# EAGLE board WS2812B-Breakout-v1-panel (EAGLE 5.12)
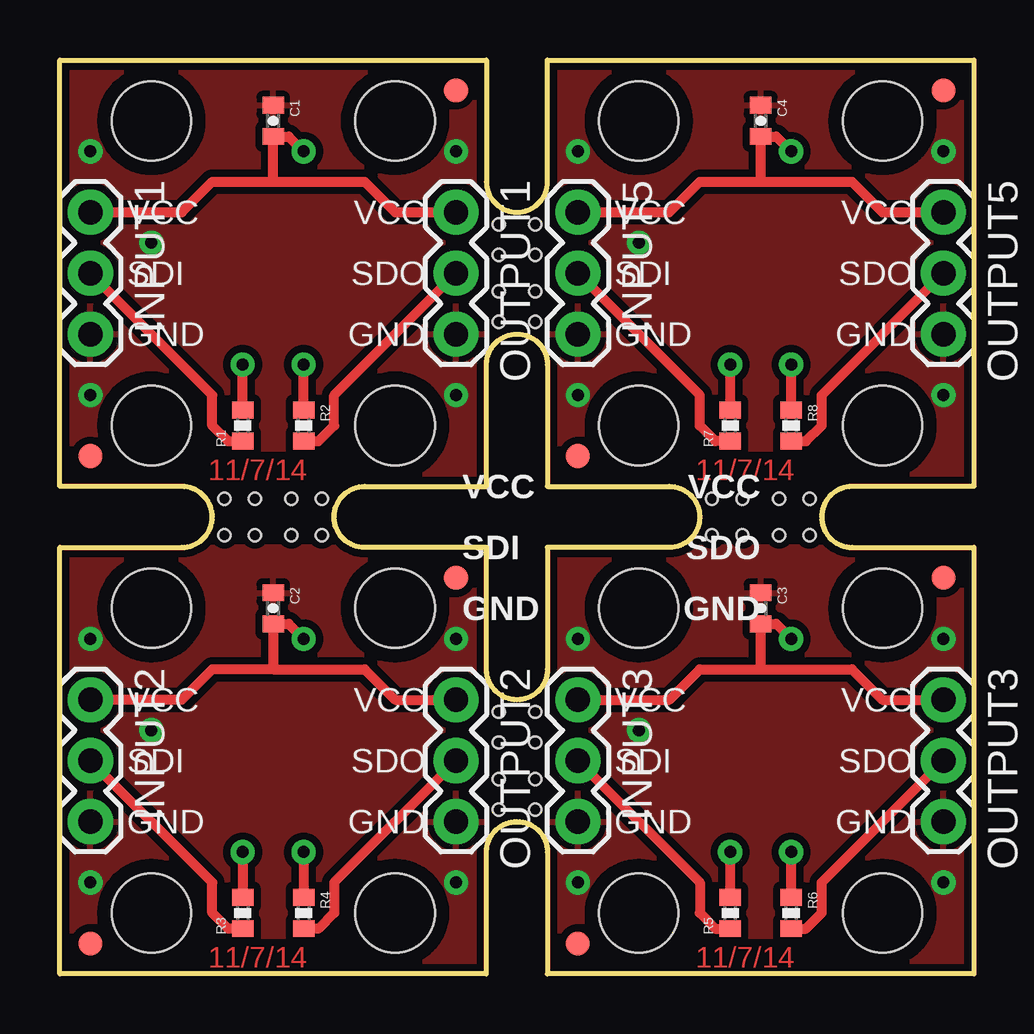
[diagram p0: board, top side]
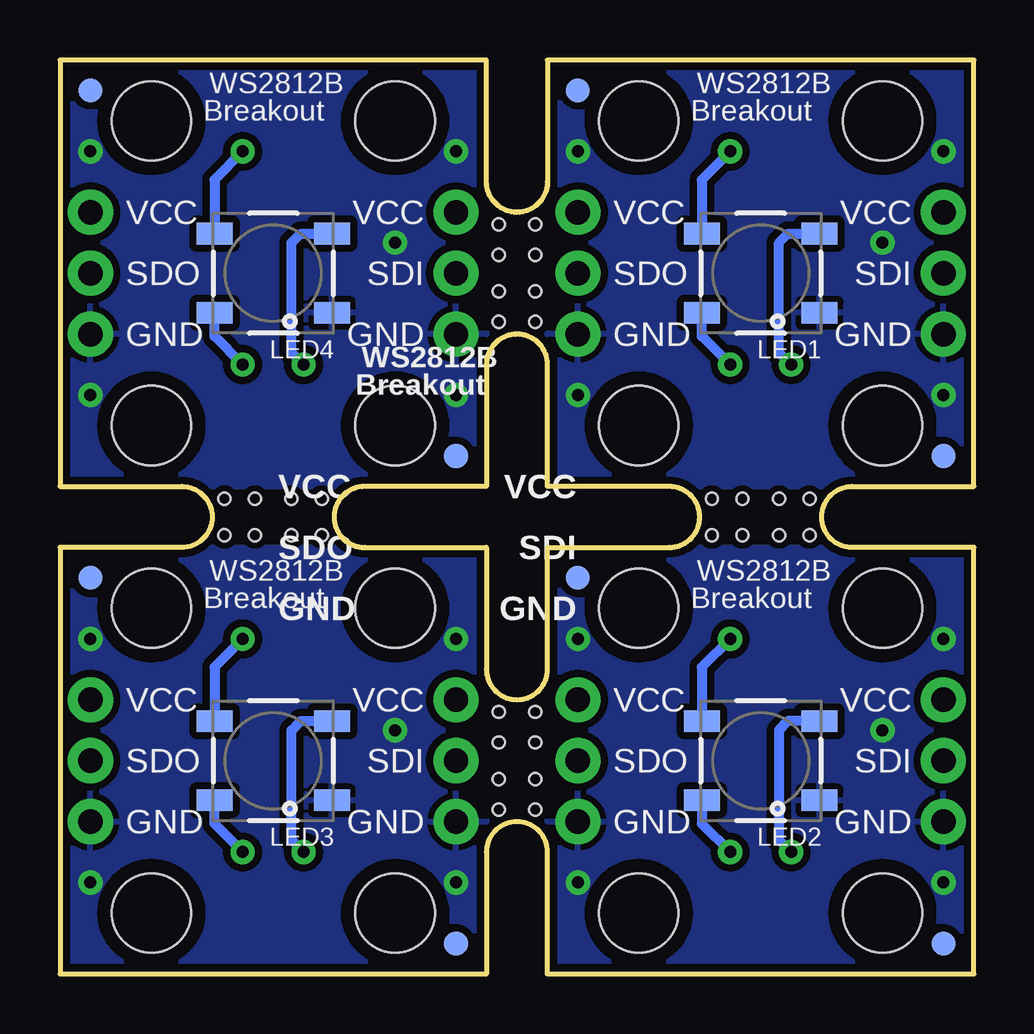
[diagram p1: board, bottom side, seen from below]

Size 38.1 x 38.1 mm. Coordinates in mm from the lower left corner, seen from the top.
Outline: 0,0 0,17.78 5.08,17.78 arc90 6.35,19.05 arc90 5.08,20.32 0,20.32 0,38.1 17.78,38.1 17.78,33.02 arc90 19.05,31.75 arc90 20.32,33.02 20.32,38.1 38.1,38.1 38.1,20.32 33.02,20.32 arc90 31.75,19.05 arc90 33.02,17.78 38.1,17.78 38.1,0 20.32,0 20.32,5.08 arc90 19.05,6.35 arc90 17.78,5.08 17.78,0 0,0
Outline: 17.78,17.78 12.7,17.78 arc-90 11.43,19.05 arc-90 12.7,20.32 17.78,20.32 17.78,25.4 arc-90 19.05,26.67 arc-90 20.32,25.4 20.32,20.32 25.4,20.32 arc-90 26.67,19.05 arc-90 25.4,17.78 20.32,17.78 20.32,12.7 arc-90 19.05,11.43 arc-90 17.78,12.7 17.78,17.78
Copper layers (1*16): Top 0.035mm / dielectric 1.5mm / Bottom 0.035mm
Design rules "SparkFun *": minimum track width 8mil, minimum drill 19mil, track to track 8mil, track to pad 8mil, pad to pad 8mil, via to via 8mil, smd to smd 8mil, copper to edge 8mil, drill to drill 8mil, minimum pad ring 12mil, minimum via ring 10mil, stop-mask expansion 4mil, vias tented up to drill 20mil, thermal gap 10mil
Holes 0.5 mm at 18.29,31.24 18.29,29.97 18.29,28.45 18.29,27.18 19.81,27.18 19.81,28.45 19.81,29.97 19.81,31.24 18.29,10.92 18.29,9.65 18.29,8.13 18.29,6.86 19.81,6.86 19.81,8.13 19.81,9.65 19.81,10.92 6.86,18.29 8.13,18.29 9.65,18.29 10.92,18.29 10.92,19.81 9.65,19.81 8.13,19.81 6.86,19.81 27.18,18.29 28.45,18.29 29.97,18.29 31.24,18.29 31.24,19.81 29.97,19.81 28.45,19.81 27.18,19.81

## Footprints (pad centres in the part's own frame; a part is rotated, then mirrored left to right if it is on the bottom)
0402-CAP = smd 0.7 x 0.9: 1 -0.65,0; 2 0.65,0
1X03 = drill 1.016 pad 1.88 round: 1 0,0; 2 2.54,0; 3 5.08,0
STAND-OFF = hole 3.302: 0,0
FIDUCIAL-1X2 = smd 1 x 1: 1 0,0
LED-TRICOLOR-5050-4PIN = smd 1.5 x 0.9: 1 2.45,-1.65; 2 2.45,1.65; 3 -2.45,1.65; 4 -2.45,-1.65
0402-RES = smd 0.7 x 0.9: 1 -0.65,0; 2 0.65,0

## Placement (x,y rotation side)
C1  0.1uF  [0402-CAP]  8.89,35.56 270 top
C2  0.1uF  [0402-CAP]  8.89,15.24 270 top
C3  0.1uF  [0402-CAP]  29.21,15.24 270 top
C4  0.1uF  [0402-CAP]  29.21,35.56 270 top
INPUT1  [1X03]  1.27,31.75 270 top
INPUT2  [1X03]  1.27,11.43 270 top
INPUT3  [1X03]  21.59,11.43 270 top
INPUT5  [1X03]  21.59,31.75 270 top
JP1  STAND-OFF  [STAND-OFF]  13.97,35.56 0 top
JP2  STAND-OFF  [STAND-OFF]  3.81,22.86 0 top
JP3  STAND-OFF  [STAND-OFF]  3.81,35.56 0 top
JP4  STAND-OFF  [STAND-OFF]  13.97,22.86 0 top
JP5  FIDUCIAL1X2  [FIDUCIAL-1X2]  16.51,36.83 0 top
JP6  FIDUCIAL1X2  [FIDUCIAL-1X2]  1.27,21.59 0 top
JP7  FIDUCIAL1X2  [FIDUCIAL-1X2]  1.27,21.59 0 bottom
JP8  FIDUCIAL1X2  [FIDUCIAL-1X2]  16.51,36.83 0 bottom
JP9  STAND-OFF  [STAND-OFF]  13.97,15.24 0 top
JP10  STAND-OFF  [STAND-OFF]  3.81,2.54 0 top
JP11  STAND-OFF  [STAND-OFF]  3.81,15.24 0 top
JP12  STAND-OFF  [STAND-OFF]  13.97,2.54 0 top
JP13  FIDUCIAL1X2  [FIDUCIAL-1X2]  16.51,16.51 0 top
JP14  FIDUCIAL1X2  [FIDUCIAL-1X2]  1.27,1.27 0 top
JP15  FIDUCIAL1X2  [FIDUCIAL-1X2]  1.27,1.27 0 bottom
JP16  FIDUCIAL1X2  [FIDUCIAL-1X2]  16.51,16.51 0 bottom
JP17  STAND-OFF  [STAND-OFF]  34.29,15.24 0 top
JP18  STAND-OFF  [STAND-OFF]  24.13,2.54 0 top
JP19  STAND-OFF  [STAND-OFF]  24.13,15.24 0 top
JP20  STAND-OFF  [STAND-OFF]  34.29,2.54 0 top
JP21  FIDUCIAL1X2  [FIDUCIAL-1X2]  36.83,16.51 0 top
JP22  FIDUCIAL1X2  [FIDUCIAL-1X2]  21.59,1.27 0 top
JP23  FIDUCIAL1X2  [FIDUCIAL-1X2]  21.59,1.27 0 bottom
JP24  FIDUCIAL1X2  [FIDUCIAL-1X2]  36.83,16.51 0 bottom
JP25  STAND-OFF  [STAND-OFF]  34.29,35.56 0 top
JP26  STAND-OFF  [STAND-OFF]  24.13,22.86 0 top
JP27  STAND-OFF  [STAND-OFF]  24.13,35.56 0 top
JP28  STAND-OFF  [STAND-OFF]  34.29,22.86 0 top
JP29  FIDUCIAL1X2  [FIDUCIAL-1X2]  36.83,36.83 0 top
JP30  FIDUCIAL1X2  [FIDUCIAL-1X2]  21.59,21.59 0 top
JP31  FIDUCIAL1X2  [FIDUCIAL-1X2]  21.59,21.59 0 bottom
JP32  FIDUCIAL1X2  [FIDUCIAL-1X2]  36.83,36.83 0 bottom
LED1  WS2812B  [LED-TRICOLOR-5050-4PIN]  8.89,29.21 180 bottom
LED2  WS2812B  [LED-TRICOLOR-5050-4PIN]  8.89,8.89 180 bottom
LED3  WS2812B  [LED-TRICOLOR-5050-4PIN]  29.21,8.89 180 bottom
LED4  WS2812B  [LED-TRICOLOR-5050-4PIN]  29.21,29.21 180 bottom
OUTPUT1  [1X03]  16.51,31.75 270 top
OUTPUT2  [1X03]  16.51,11.43 270 top
OUTPUT3  [1X03]  36.83,11.43 270 top
OUTPUT5  [1X03]  36.83,31.75 270 top
R1  27  [0402-RES]  7.62,22.86 90 top
R2  27  [0402-RES]  10.16,22.86 270 top
R3  27  [0402-RES]  7.62,2.54 90 top
R4  27  [0402-RES]  10.16,2.54 270 top
R5  27  [0402-RES]  27.94,2.54 90 top
R6  27  [0402-RES]  30.48,2.54 270 top
R7  27  [0402-RES]  27.94,22.86 90 top
R8  27  [0402-RES]  30.48,22.86 270 top
U$1  CREATIVE_COMMONS  [CREATIVE_COMMONS]  0,0 0 top
U$2  CREATIVE_COMMONS  [CREATIVE_COMMONS]  20.32,0 0 top
U$3  CREATIVE_COMMONS  [CREATIVE_COMMONS]  0,20.32 0 top
U$4  CREATIVE_COMMONS  [CREATIVE_COMMONS]  20.32,20.32 0 top

## Library data of the parts
C1-C4 INPUT1-INPUT3 INPUT5 JP1-JP32 OUTPUT1-OUTPUT3 OUTPUT5 R1-R8 U$1-U$4 = SparkFun
LED1-LED4 = rbg-worldsemi-led

## Nets
GND5: C1.1 INPUT1.3 LED1.3 OUTPUT1.3
GND6: C2.1 INPUT2.3 LED2.3 OUTPUT2.3
GND7: C3.1 INPUT3.3 LED3.3 OUTPUT3.3
GND8: C4.1 INPUT5.3 LED4.3 OUTPUT5.3
N$1: LED1.4 R1.2
N$2: LED1.2 R2.1
N$3: LED2.4 R3.2
N$4: LED2.2 R4.1
N$5: LED3.4 R5.2
N$6: LED3.2 R6.1
N$7: LED4.4 R7.2
N$8: LED4.2 R8.1
SDI1: INPUT1.2 R1.1
SDI2: INPUT2.2 R3.1
SDI3: INPUT3.2 R5.1
SDI5: INPUT5.2 R7.1
SDO1: OUTPUT1.2 R2.2
SDO2: OUTPUT2.2 R4.2
SDO3: OUTPUT3.2 R6.2
SDO5: OUTPUT5.2 R8.2
VCC1: C1.2 INPUT1.1 LED1.1 OUTPUT1.1
VCC2: C2.2 INPUT2.1 LED2.1 OUTPUT2.1
VCC3: C3.2 INPUT3.1 LED3.1 OUTPUT3.1
VCC5: C4.2 INPUT5.1 LED4.1 OUTPUT5.1

## Tracks (layer width: path | path; a pad name or v marks a point on that pad's centre or on a via)
GND5  (via drill 0.5)
  other vias: 3.81,30.48 1.27,24.13 16.51,24.13 1.27,34.29 16.51,34.29
  pour Bottom (isolate 0.305): 0,38.1 0,20.32 17.78,20.32 17.78,38.1
  pour Top (isolate 0.305): 0,38.1 0,20.32 17.78,20.32 17.78,38.1
GND6  (via drill 0.5)
  other vias: 3.81,10.16 1.27,3.81 16.51,3.81 1.27,13.97 16.51,13.97
  pour Bottom (isolate 0.305): 0,17.78 0,0 17.78,0 17.78,17.78
  pour Top (isolate 0.305): 0,17.78 0,0 17.78,0 17.78,17.78
GND7  (via drill 0.5)
  other vias: 24.13,10.16 21.59,3.81 36.83,3.81 21.59,13.97 36.83,13.97
  pour Bottom (isolate 0.305): 20.32,17.78 20.32,0 38.1,0 38.1,17.78
  pour Top (isolate 0.305): 20.32,17.78 20.32,0 38.1,0 38.1,17.78
GND8  (via drill 0.5)
  other vias: 24.13,30.48 21.59,24.13 36.83,24.13 21.59,34.29 36.83,34.29
  pour Bottom (isolate 0.305): 20.32,38.1 20.32,20.32 38.1,20.32 38.1,38.1
  pour Top (isolate 0.305): 20.32,38.1 20.32,20.32 38.1,20.32 38.1,38.1
N$1  (via drill 0.5)
  Top 0.406: R1.2 v7.62,25.4
  Bottom 0.406: LED1.4 7.75,30.86 8.13,30.48 8.13,25.91 v7.62,25.4
N$2  (via drill 0.5)
  Top 0.406: R2.1 v10.16,25.4
  Bottom 0.406: LED1.2 11.34,26.58 v10.16,25.4
N$3  (via drill 0.5)
  Top 0.406: v7.62,5.08 R3.2
  Bottom 0.406: LED2.4 7.75,10.54 8.13,10.16 8.13,5.59 v7.62,5.08
N$4  (via drill 0.5)
  Top 0.406: v10.16,5.08 R4.1
  Bottom 0.406: LED2.2 11.34,6.26 v10.16,5.08
N$5  (via drill 0.5)
  Top 0.406: R5.2 v27.94,5.08
  Bottom 0.406: LED3.4 28.07,10.54 28.45,10.16 28.45,5.59 v27.94,5.08
N$6  (via drill 0.5)
  Top 0.406: R6.1 v30.48,5.08
  Bottom 0.406: LED3.2 31.66,6.26 v30.48,5.08
N$7  (via drill 0.5)
  Top 0.406: R7.2 v27.94,25.4
  Bottom 0.406: LED4.4 28.07,30.86 28.45,30.48 28.45,25.91 v27.94,25.4
N$8  (via drill 0.5)
  Top 0.406: R8.1 v30.48,25.4
  Bottom 0.406: LED4.2 31.66,26.58 v30.48,25.4
SDI1
  Top 0.406: R1.1 7,22.21 6.35,22.86 6.35,24.13 INPUT1.2
SDI2
  Top 0.406: R3.1 7,1.89 6.35,2.54 6.35,3.81 INPUT2.2
SDI3
  Top 0.406: R5.1 27.32,1.89 26.67,2.54 26.67,3.81 INPUT3.2
SDI5
  Top 0.406: R7.1 27.32,22.21 26.67,22.86 26.67,24.13 INPUT5.2
SDO1
  Top 0.406: R2.2 10.78,22.21 11.43,22.86 11.43,24.13 OUTPUT1.2
SDO2
  Top 0.406: R4.2 10.78,1.89 11.43,2.54 11.43,3.81 OUTPUT2.2
SDO3
  Top 0.406: R6.2 31.1,1.89 31.75,2.54 31.75,3.81 OUTPUT3.2
SDO5
  Top 0.406: R8.2 31.1,22.21 31.75,22.86 31.75,24.13 OUTPUT5.2
VCC1  (via drill 0.5)
  Top 0.406: INPUT1.1 5.08,31.75 6.35,33.02 8.89,33.02 | 8.89,33.02 12.7,33.02 13.97,31.75 OUTPUT1.1 | 8.89,33.02 C1.2 9.54,34.91 v10.16,34.29
  Bottom 0.406: LED1.1 11.34,33.11 v10.16,34.29
VCC2  (via drill 0.5)
  Top 0.406: INPUT2.1 5.08,11.43 6.35,12.7 8.89,12.7 | 8.89,12.7 12.7,12.7 13.97,11.43 OUTPUT2.1 | 8.89,12.7 C2.2 9.54,14.59 v10.16,13.97
  Bottom 0.406: LED2.1 11.34,12.79 v10.16,13.97
VCC3  (via drill 0.5)
  Top 0.406: INPUT3.1 25.4,11.43 26.67,12.7 29.21,12.7 | 29.21,12.7 33.02,12.7 34.29,11.43 OUTPUT3.1 | 29.21,12.7 C3.2 29.86,14.59 v30.48,13.97
  Bottom 0.406: LED3.1 31.66,12.79 v30.48,13.97
VCC5  (via drill 0.5)
  Top 0.406: INPUT5.1 25.4,31.75 26.67,33.02 29.21,33.02 | 29.21,33.02 33.02,33.02 34.29,31.75 OUTPUT5.1 | 29.21,33.02 C4.2 29.86,34.91 v30.48,34.29
  Bottom 0.406: LED4.1 31.66,33.11 v30.48,34.29

## Text on the board
Top: 11/7/14 | 11/7/14 | 11/7/14 | 11/7/14
tPlace: VCC | VCC | SDO | SDI | GND | GND
bPlace: WS2812B | Breakout | VCC | VCC | SDI | SDO | GND | GND
_tsilk: VCC | VCC | VCC | VCC | SDO | SDO | SDI | SDI | GND | GND | GND | GND | VCC | VCC | VCC | VCC | SDO | SDO | SDI | SDI | GND | GND | GND | GND
_bsilk: WS2812B | WS2812B | Breakout | Breakout | VCC | VCC | VCC | VCC | SDI | SDI | SDO | SDO | GND | GND | GND | GND | WS2812B | WS2812B | Breakout | Breakout | VCC | VCC | VCC | VCC | SDI | SDI | SDO | SDO | GND | GND | GND | GND